# Altium PCB 6F_Test.PcbDoc
Units mm, origin at the board's own origin, x right, y up, seen from the top; angles counter-clockwise.
Board outline 156 x 86.1 mm, 2 copper layers (Top Layer, Bottom Layer); 56 components, 44 nets, 190 pads, 1 vias.
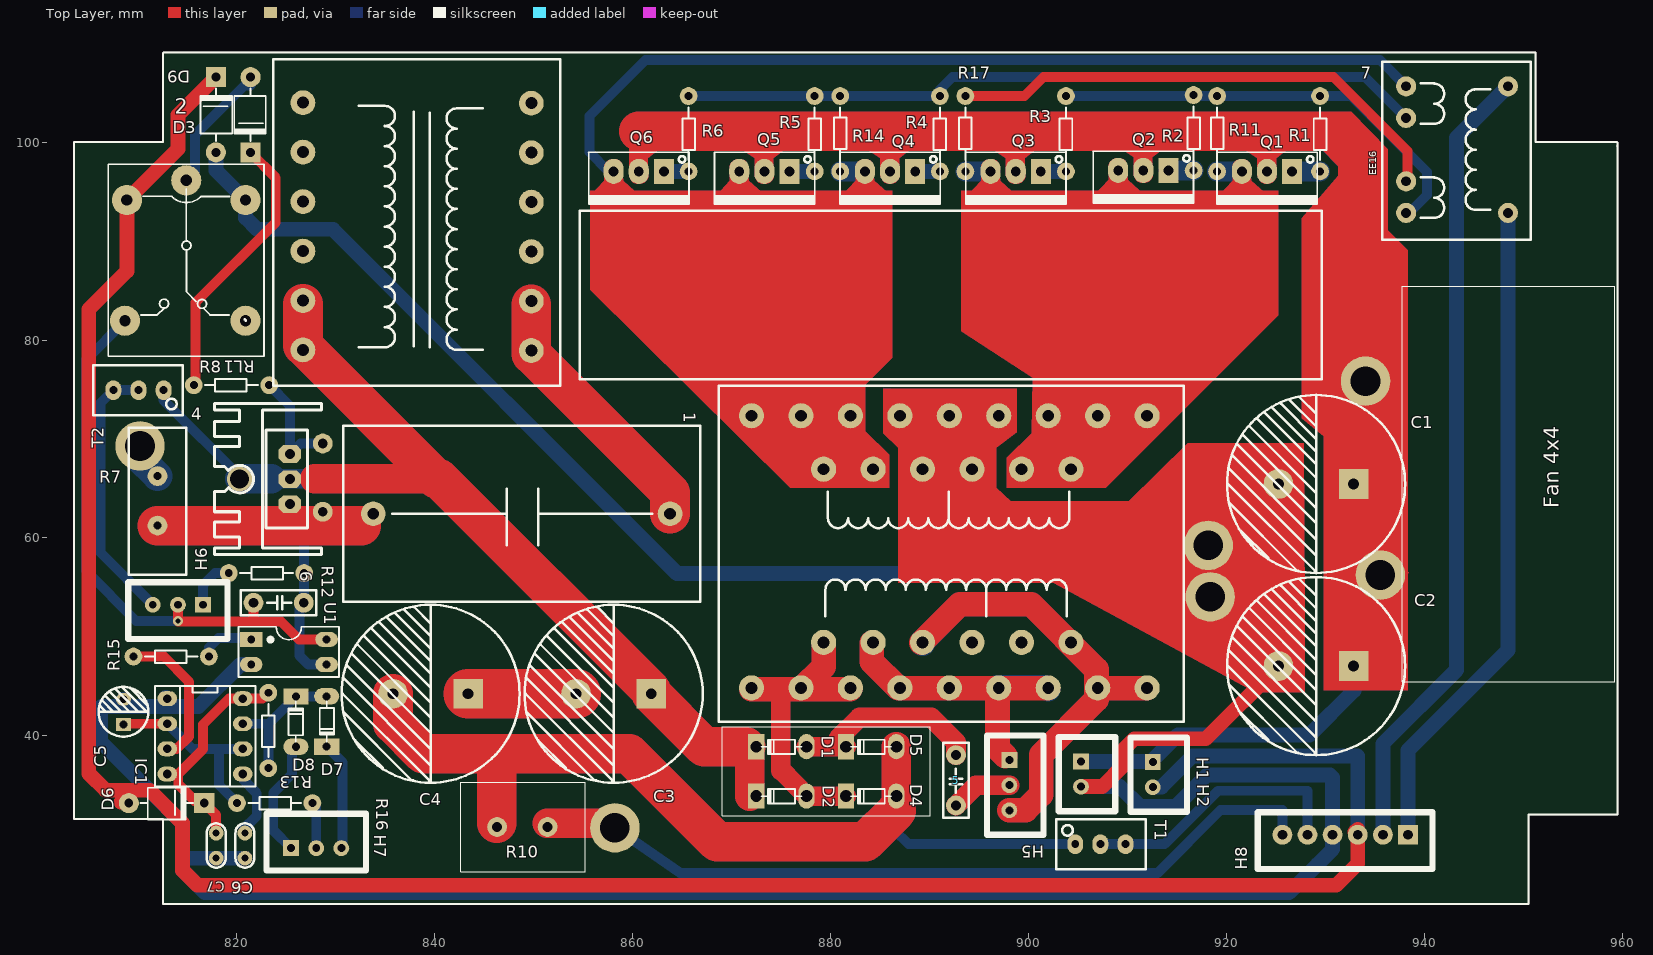
[diagram p0: Top Layer view]
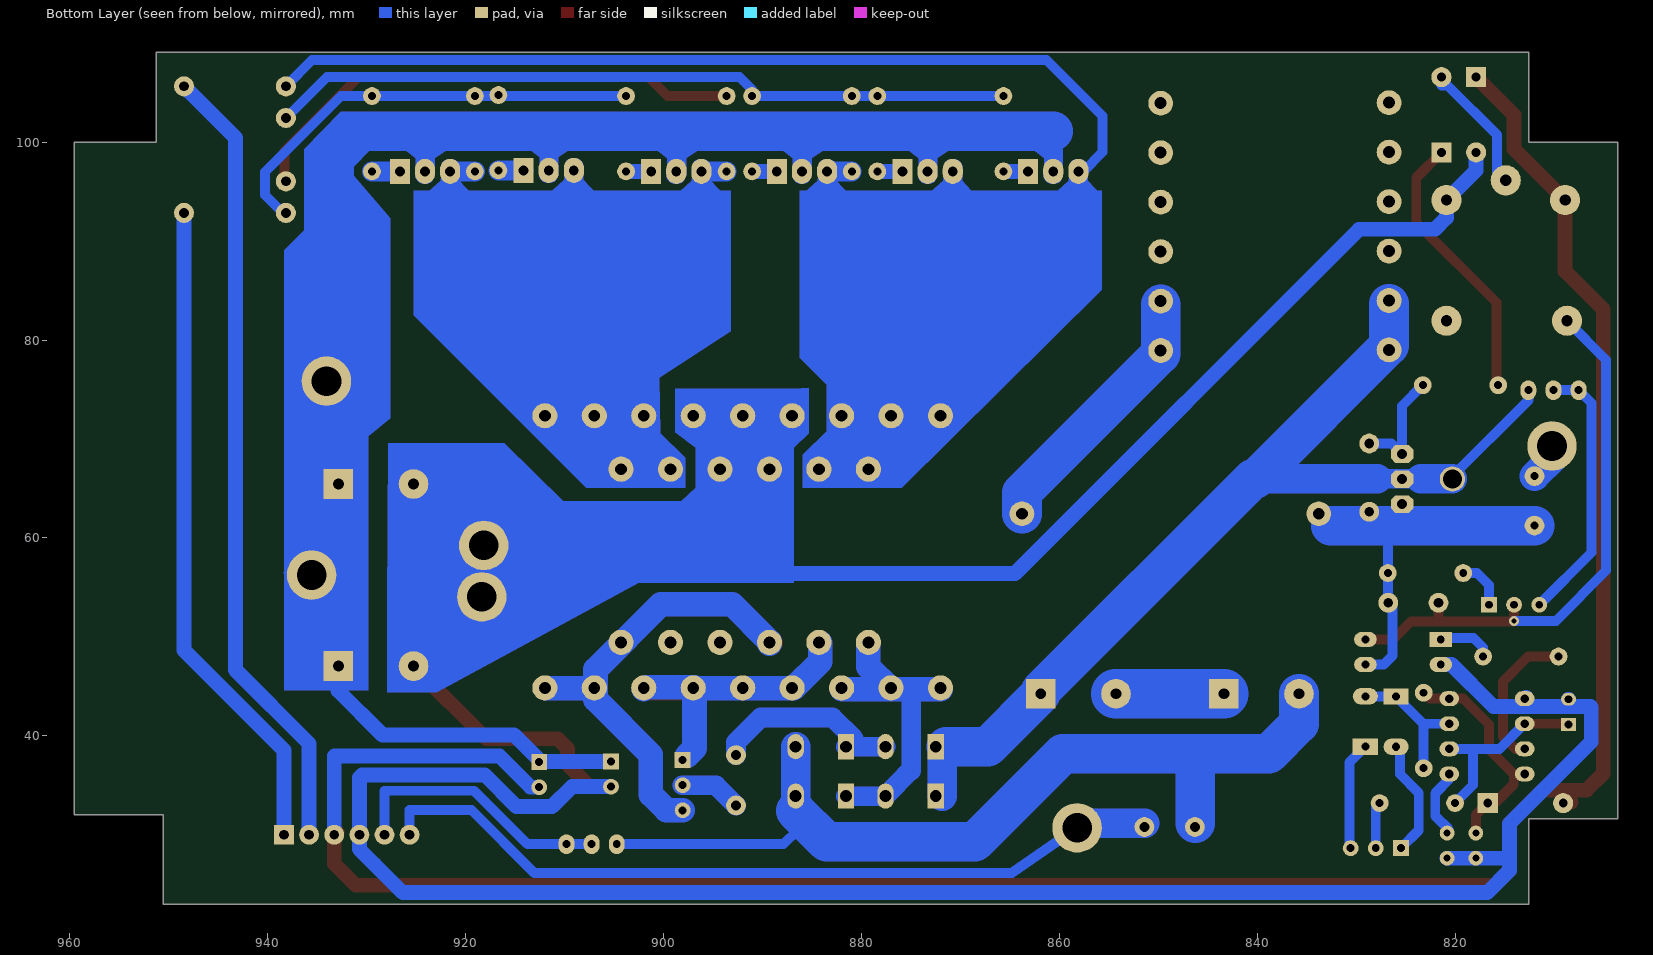
[diagram p1: Bottom Layer view, seen from below]
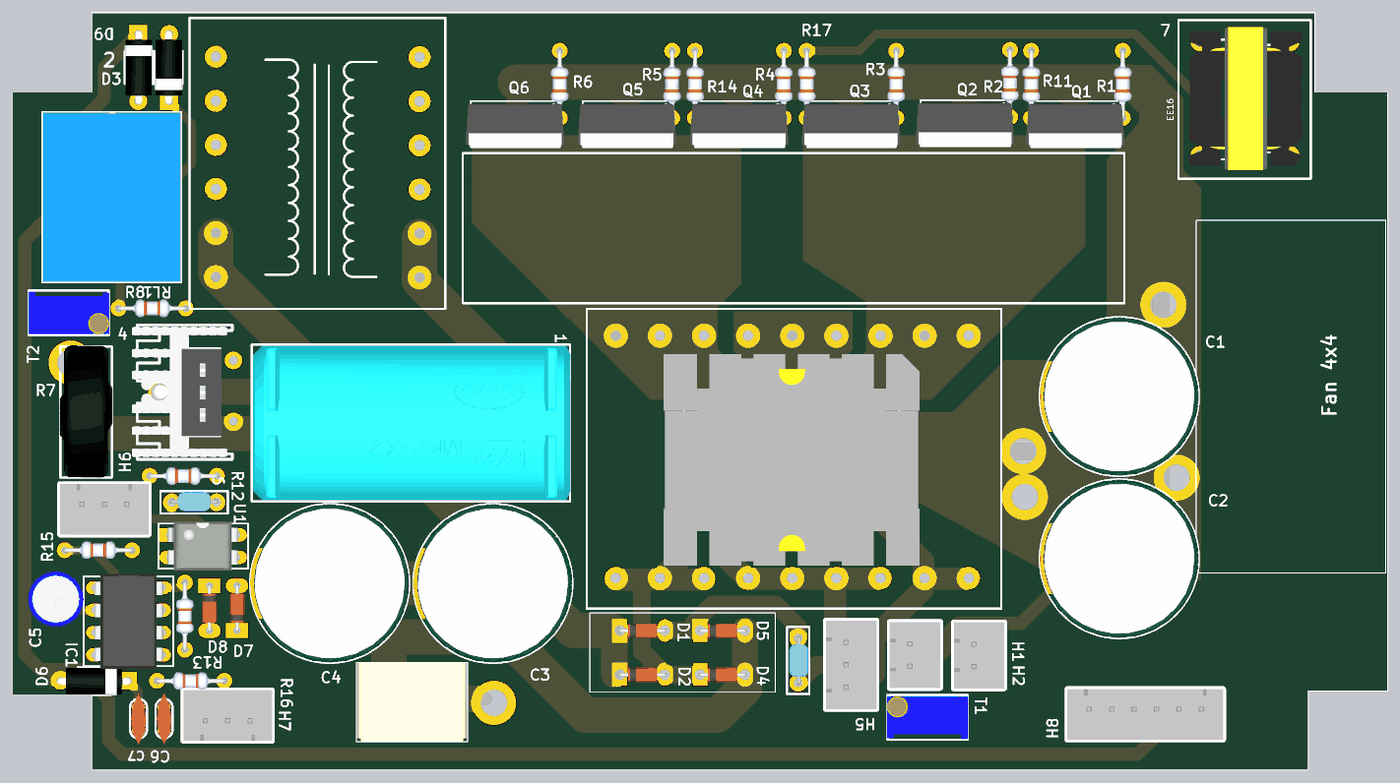
[diagram p2: 3D render of the assembled board from above, using the file's embedded part models]

## Layer stack, top to bottom
Top Layer: signal copper 0.0356
Dielectric: dielectric 0.32, FR-4, Dk 4.8
Bottom Layer: signal copper 0.0356

## Board outline
812.571,109.1 812.571,100 803.571,100 803.571,31.6 812.571,31.6 812.571,23 950.571,23 950.571,32 959.571,32 959.571,100 951.271,100 951.271,109.1 812.571,109.1

## Design rules (kind name [scope] priority, off if disabled: settings)
Clearance [All] p1: gap=0.254
PolygonConnect [All] p1: connectstyle=Relief reliefconductorwidth=0.254 reliefentries=4 polygonreliefangle="90 Angle"
RoomDefinition 6F [InComponentClass('6F')] p1: confinementstyle=ConfineIn formatcopy=TRUE lockcomponents=FALSE outline 840.266,26.56 887.166,26.56 887.166,63.26 840.266,63.26
RoutingVias [All] p1: holewidth=0.711 width=1.27 viastyle="Through Hole" minholewidth=0.711 minwidth=1.27 maxholewidth=0.711 maxwidth=1.27
SilkscreenOverComponentPads [All] p1: minsilkscreentomaskgap=0.254
SolderMaskExpansion [All] p1: expansion=0.102
Width [All] p1: maxlimit=10 minlimit=0.254 preferedwidth=0.254
27 further rules are at their usual default settings.

## Components (designator, comment, footprint, x,y, rotation, side; value= is the part's Value field where it differs from the comment)
1 "Cap_5UF250V" Cap_5UF250V 863.771,62.45 r0 top
2 "INDUCTOR_EE33" EE33 826.671,79 r90 top
4 "TYN_1225" QTO-220H3 825.351,63.41 r90 top
5 "Cap_684J250V" Cap_104J400V 892.671,38.05 r270 top
6 "Cap_104J400V" Cap_104J400V 821.671,53.45 r0 top
7 "EE16" EE16 938.171,92.85 r90 top
C1 "4700uF" "tu hoa 18mm" 929.071,65.45 r0 top
C2 "4700uF" "tu hoa 18mm" 929.071,47.05 r0 top
C3 "100uF" "tu Hoa 18mm" 858.071,44.25 r0 top
C4 "100uF" "tu Hoa 18mm" 839.571,44.25 r0 top
C5 "1uF" "tu hoa 5mm" 808.525,42.425 r90 top
C6 "104" "tu gom" 820.8,28.9 r270 top
C7 "104" "tu gom" 817.9,28.9 r270 top
D1 "Diode" "DIODE 0.5A"#1 875.025,38.901 r0 top
D2 "Diode" "DIODE 0.5A"#1 875.025,33.901 r0 top
D3 "100v" "DIODE 1A" 821.371,107.85 r90 top
D4 "Diode" "DIODE 0.5A"#1 884.105,33.901 r0 top
D5 "Diode" "DIODE 0.5A"#1 884.105,38.901 r0 top
D6 "100v" "DIODE 1A" 807.8,33.2 r180 top
D7 "100v" "DIODE 0.5A"#2 829.071,41.45 r90 top
D8 "100v" "DIODE 0.5A"#2 825.95,41.437 r270 top
D9 "100v" "DIODE 1A" 817.871,97.7 r270 top
H1 "Fan" XH2.54M-2 905.311,37.401 r270 top
H2 "JackCoBop" XH2.54M-2 912.571,37.35 r270 top
H5 "Switch" XH2.54M-3 898.071,37.55 r270 top
H6 "TanSo" XH2.54M-3 816.571,53.25 r180 top
H7 "TanSo" XH2.54M-3 825.471,28.65 r0 top
H8 "Header 6P 2.54 Duc Thang" XH2.54M-6 938.365,30.001 r180 top
IC1 "LM555 DIP" DIP8 816.771,39.95 r270 top
Q1 "IRF840" QTO-220 926.651,97.05 r180 top
Q2 "IRF840" QTO-220 914.151,97.15 r180 top
Q3 "IRF840" QTO-220 901.251,97.05 r180 top
Q4 "IRF840" QTO-220 888.551,97.05 r180 top
Q5 "IRF840" QTO-220 875.851,97.05 r180 top
Q6 "IRF840" QTO-220 863.151,97.05 r180 top
R1 "100" PCBComponent_1 929.471,104.67 r270 top
R2 "100" PCBComponent_1 916.691,104.77 r270 top
R3 "100" PCBComponent_1 903.791,104.67 r270 top
R4 "100" PCBComponent_1 891.051,104.67 r270 top
R5 "100" PCBComponent_1 878.391,104.67 r270 top
R6 "100" PCBComponent_1 865.651,104.67 r270 top
R7 "5D-9" "tro nhiet d-9" 811.971,63.75 r90 top
R8 "100" PCBComponent_1 823.257,75.445 r180 top
R10 "0.47R" Res_5W 838.497,27.185 r0 top
R11 "2k2" PCBComponent_1 919.071,97.05 r90 top
R12 "2k2" PCBComponent_1 819.171,56.45 r0 top
R13 "18K/4148" PCBComponent_1 823.171,44.35 r270 top
R14 "2k2" PCBComponent_1 880.971,97.05 r90 top
R15 "2k2" PCBComponent_1 817.161,48.013 r180 top
R16 "18K/4148" PCBComponent_1 820,33.2 r0 top
R17 "0" PCBComponent_1 893.623,97.05 r90 top
RL1 "Relay" "Relay 5 Chan SRD" 814.871,96.15 r270 top
T1 "10K" "Bien Tro Vi Chinh Dung" 907.271,29.05 r0 top
T2 "10K" "Bien Tro Vi Chinh Dung" 810.049,74.937 r180 top
U1 "OPTO PC817 DIP4" DIP4 821.371,49.75 r270 top
? "E2842" E2842 867.8,38.6 r0 top

## Footprints (in the part's own frame and the unit in brackets; to place one, negate y for a bottom-side part, rotate by r counter-clockwise, add the part's x,y. Pads: shape width x height; smd on the part's side, far side on the other; paste and mask are expansions set on the pad)
"Bien Tro Vi Chinh Dung" [mm] "Bien tro vi chinh"
  oval 1.6x2 hole 0.8: 1(-2.54,0) 2(0,0) 3(2.54,0)
  silkscreen extent -4.47,-2.54 4.6,2.54, body extent -4.54,-2.4 4.66,2.4, height 12.02
Cap_5UF250V [mm] "C?"
  round 2.5 hole 1.2: 1(0,0) 2(-30,0)
  silkscreen extent -33.02,-8.89 3.05,8.89, body extent -32.89,-8.75 3.11,8.75, height 31.5
Cap_104J400V [mm] "C?"
  round 2 hole 1: 1(0,0) 2(5.08,0)
  silkscreen extent -1.27,-1.27 6.35,1.27, body extent -0.25,-1.02 5.33,1.19, height 6
"DIODE 0.5A"#1 [mm] "Diode muoi, xung"
  oval 1.651x2.54 hole 1.2: 1(2.54,0)
  rect 1.651x2.54 hole 1.2: 2(-2.54,0)
  silkscreen extent -2.03,-0.76 2.03,0.71, body extent -2.76,-0.84 2.76,0.81, height 1.56
"DIODE 0.5A"#2 [mm] "Diode muoi, xung"
  oval 1.651x2.54 hole 0.813: 1(2.54,0)
  rect 1.651x2.54 hole 0.813: 2(-2.54,0)
  silkscreen extent -2.03,-0.76 2.03,0.71, body extent -2.76,-0.84 2.76,0.81, height 1.56
"DIODE 1A" [mil] "Diode 1A"
  round 80 hole 35: 1(-50,0)
  rect 80x80 hole 35: 2(-350,0)
  silkscreen extent -305,-61 -95,65, body extent -366,-61 -34,65, height 122
DIP4 [mil] "W.300/L.400"
  rect 60x90 hole 31: 1(0,2.52)
  oval 60x90 hole 31: 2(100,2.52) 3(100,302.52) 4(0,302.52)
  silkscreen extent -50,-47 150,353, body extent -59,-7 159,307, height 170
DIP8 [mm] "W.300/L.400"
  oval 1.5x2 hole 0.864: 1(-3.81,-3.81) 2(-1.27,-3.81) 3(1.27,-3.81) 4(3.81,-3.81) 5(3.81,3.81) 6(1.27,3.81) 7(-1.27,3.81) 8(-3.81,3.81)
  silkscreen extent -5.08,-5.08 5.08,5.08, body extent -5.4,-3.88 5.4,3.88, height 4.5
E2842 [mm] "L?"
  round 2.54 hole 1.2: 0v(4.2,6.25) 0v(9.2,6.25) 0v(11.5,10.85) 0v(14.2,6.25) D1(4.2,33.75) D1(9.2,33.75) D1(11.5,28.35) D1(14.2,33.75) D1(16.5,28.35) D2(31.5,28.35) D2(34.2,33.75) D2(36.5,28.35) D2(39.2,33.75) D2(44.2,33.75) GND(19.2,33.75) GND(21.5,28.35) GND(24.2,33.75) GND(26.5,28.35) GND(29.2,33.75) Out1(16.5,10.85) Out1(19.2,6.25) Out1(24.2,6.25) Out1(29.2,6.25) Out1(34.2,6.25) Out2(21.5,10.85) Out2(36.5,10.85) Out2(39.2,6.25) Out2(44.2,6.25) ""(26.5,10.85) ""(31.5,10.85)
  Bottom Layer lines w2: 21.5,10.85 21.582,10.85
  silkscreen extent 0.9,2.8 47.9,36.8, body extent 9.62,7.66 38.62,31.66, height 21.4
EE16 [mil] "L?"
  round 80 hole 39: 1(0,-405.51) 2(503.94,-405.51) G1(0,0) G2(377.95,0) S1(125.98,0) S2(503.94,0)
  silkscreen extent -106,-496 602,94, body extent -67,-461 571,48, height 652
EE33 [mm] "?"
  round 2.5 hole 1.2: 1(0,0) 1(5,0) 3(10,0) 4(15,0) 5(20,0) 6(25,0) 7(-0.054,-23.085) 7(4.946,-23.085) 9(9.946,-23.085) 10(14.946,-23.085) 11(19.946,-23.085) 12(24.946,-23.085)
  silkscreen extent -3.6,-26 29.4,3
PCBComponent_1 [mm]
  round 1.8 hole 0.8: 0(0,0) 1(7.62,0)
  silkscreen extent 1.14,-0.63 6.48,0.64, body extent -0.24,-1.02 7.86,0.98, height 2
QTO-220 [mil] "TO-220 - 1-2-3"
  rect 80x100 hole 39: 1(0,0)
  oval 80x100 hole 39: 2(100,0) 3(200,0)
  silkscreen extent -100,-76 300,130, body extent -119,-64 322,121, height 755
QTO-220H3 [mil] "TO-220 1-2-3"
  oct 70x90 hole 40: 1(0,0) 2(100,0) 3(200,0)
  round 100 hole 75: 2(100,200)
  silkscreen extent -200,-125 400,300, body extent -190,-102 392,323, height 984
"Relay 5 Chan SRD" [mil] "Relay SPDT, 5 pin, 10A,W 650mil, L 800mil, H 800mil"
  round 120 hole 45: 1(0,0) 2(559.06,236.22) 3(559.06,-243.78) 4(78.74,-236.22) 5(78.74,236.22)
  silkscreen extent -63,-311 700,310, body extent -55,-306 697,304, height 602
Res_5W [mm] "R?"
  round 2 hole 1: 1(7.8,3.6) 2(12.9,3.6)
  silkscreen extent 4.1,-0.9 16.7,8.1, body extent 4.15,-0.9 16.65,8.1, height 25
"tro nhiet d-9" [mm]
  round 2 hole 0.8: 1(-2.5,0) 2(2.5,0)
  silkscreen extent -7.49,-2.92 7.37,2.92, body extent -7.5,-3 7.5,3, height 23.5
"tu gom" [mm] "Tu gom mini"
  round 1.5 hole 0.7: 1(-1.27,0) 2(1.27,0)
  silkscreen extent -2.25,-0.97 2.22,0.97, body extent -2.92,-0.85 2.92,0.85, height 6.12
"tu hoa 5mm" [mm]
  rect 1.3x1.5 hole 0.8: 1(-1.27,0)
  oval 1.3x1.5 hole 0.8: 2(1.27,0)
  silkscreen extent -2.51,-2.51 2.51,2.51, body extent -3.12,-3.18 3.23,3.18, height 14.55
"tu hoa 18mm" [mm]
  rect 3x3 hole 1.1: 1(3.8,0)
  round 3 hole 1.1: 2(-3.8,0)
  silkscreen extent -9,-9 9,9, body extent -9.01,-9 9,9, height 3
"tu Hoa 18mm" [mm]
  rect 3x3 hole 1.1: 1(3.8,0)
  round 3 hole 1.1: 2(-3.8,0)
  silkscreen extent -9,-9 9,9, body extent -9.01,-9 9,9, height 3
XH2.54M-2 [mm]
  rect 1.6x1.6 hole 0.8: 1(0,0)
  round 1.6 hole 0.8: 2(2.54,0)
  silkscreen extent -2.48,-2.26 5.02,3.46, body extent -2.48,-2.26 5.02,3.48, height 6.91
XH2.54M-3 [mm]
  rect 1.6x1.6 hole 0.8: 1(0,0)
  round 1.6 hole 0.8: 2(2.54,0) 3(5.08,0)
  silkscreen extent -2.48,-2.26 7.56,3.46, body extent -2.48,-2.26 7.56,3.48, height 6.91
XH2.54M-6 [mm]
  rect 2x2 hole 1: 1(0,0)
  round 2 hole 1: 2(2.54,0) 3(5.08,0) 4(7.62,0) 5(10.16,0) 6(12.7,0)
  silkscreen extent -2.48,-2.26 15.18,3.46, body extent -2.48,-2.26 15.18,3.48, height 6.91

## Part data
1 5 6: "C?"
2 7 ?: "L?"
C1 C2: library part "Tu Hoa 4700uF 35V 18x30", "C?m"
C3 C4: library part "Tu Hoa 100uF 450V 18x35", "C?m"
C5: library part "Tu Hoa 1uF 50V 5x11", "C?m"
C6 C7: library part "Tu gom 104 50V", "C?m"
D1 D2 D4 D5: "Default Diode"
D3 D6 D9: library part "Diode 1N4007", "C?m"
D7 D8: library part "Diode 1N4148", "C?m"
H1 H2: library part "Header 2P 2.54 Duc Thang", "C?m"
H5 H6 H7: library part "Header 3P 2.54 Duc Thang", "C?m"
H8: "C?m"
IC1: "Dán"
Q1 Q2 Q3 Q4 Q5 Q6: "MOSFET N - CHANNEL 500V - 0.75 - 8A - TO-220"
R1 R2 R3 R4 R5 R6 R8 R11 R12 R13 R14 R15 R16 R17: library part Res_7.62, "R?"
R7: library part "Tro Nhiet NTC 5D-9", "C?m"
R10: library part Res_5W
RL1: library part "Relay 5 Chan SRD", "Relay 5 Chan"
T1 T2: library part "Bien Tro Tinh Chinh 10K Dung", "C?m"
U1: "Single Opto"

## Free pads (board coordinates)
  round 2 hole 1: 2(828.671,69.55) 3(828.671,62.65)
  round 5 hole 3: 3(810.2,69.3) 3(858.2,30.7) 3(918.171,59.25) 3(918.371,54.05) 3(934.071,75.85) 3(935.571,56.25)

## Via types
v1: diameter 1, hole 0.5, Top Layer to Bottom Layer, 1 vias

## Nets (pads, with @x,y where several pads share a name; then routed paths per layer and width w, separated by ;. In a path a pad name is that pad's centre, name@x,y a point inside that pad or via, vN(x,y) a via of type N, cw(c..) or ccw(c..) an arc to the next point about the centre after c; other vN are vias at no path point)
12V: C1.1 C2.1 H1.1 H2.1 pad.3@934.071,75.85 pad.3@935.571,56.25 Q1.2 Q2.2 Q3.2 Q4.2 Q5.2 Q6.2 | length 176.9
  Top Layer w4: 860.611,101.099 911.297,101.099 930.572,101.099
  Bottom Layer w1.5: H1.1 H2.1@912.571,37.401 ; H2.1 H2.1@912.571,37.401 ; C2.1 932.925,46.996 932.925,44.593 928.41,40.078 915.099,40.078 912.571,37.55 H2.1@912.571,37.401
  Bottom Layer w4: 860.611,101.099 911.297,101.099 930.572,101.099 933.239,98.432
-300V: C4.2 D4.1 D5.1 R10.1 T1.1 | length 166.6
  Top Layer w3: 886.645,32.413 D5.1
  Top Layer w4: C4.2 835.771,41.23 838.817,38.185 846.025,38.185 ; R10.1@846.271,31.15 846.271,37.939 846.025,38.185 ; 886.645,32.413 883.525,29.293 868.525,29.293 859.633,38.185 846.025,38.185
  Bottom Layer w1: 886.477,30.445 887.871,29.05 T1.1
  Bottom Layer w2: 846.025,36.55 846.271,36.55
  Bottom Layer w3: 886.645,32.413 D5.1
  Bottom Layer w4: C4.2 835.771,41.23 838.817,38.185 846.025,38.185 ; R10.1@846.271,31.15 846.271,36.55 846.271,37.939 846.025,38.185 ; 886.645,32.413 883.525,29.293 868.525,29.293 859.633,38.185 846.025,38.185
COBOP2: D6.1 D9.2 H2.2 H8.3 RL1.4 | length 247.3
  Top Layer w1.5: D6.1@808.271,33.281 809.483,34.493 ; D9.2@817.871,106.58 814.025,102.734 814.025,99.304 RL1.4 808.871,86.95 805.025,83.104 805.025,36.196 806.728,34.493 809.483,34.493 ; H8.3@933.009,30.277 H8.3@933.285,30.553 ; H8.3 933.285,27.085 931.093,24.893 816.007,24.893 814.5,26.4 814.5,31.176 811.183,34.493 809.483,34.493
  Bottom Layer w1.5: H2.2 913.431,34.81 916.571,37.95 933.271,37.95 ; H8.3 933.285,37.936
DB3: D3.1 RL1.1 | length 12.6
  Bottom Layer w1: RL1.1 815.771,97.05 815.771,100.75 820.761,105.74 D3.1@821.371,105.74
E16_1: 7.1 H8.1 | length 67
  Bottom Layer w1.5: H8.1 938.365,38.544 948.471,48.65 7.1
E16_2: 7.2 H8.2 | length 80.9
  Bottom Layer w1.5: H8.2 935.825,39.204 943.271,46.65 943.271,100.45 7.2
G1: 7.G1 R1.0 R2.0 R3.0 R11.1 | length 44.8
  Bottom Layer w1: R3.0 R11.1 932.589,104.67 940.271,96.988 940.271,94.65 938.471,92.85 7.G1
G2: 7.G2 R4.0 R5.0 R6.0 R14.1 | length 75.4
  Bottom Layer w1: R6.0 R5.0 R14.1 R4.0 891.051,105.33 892.314,106.593 934.028,106.593 7.G2
GND: ?.GND C1.2 C2.2 C5.2 C6.2 C7.2 D9.1 H1.2 H8.4 IC1.1 pad.3@918.171,59.25 pad.3@918.371,54.05 RL1.5 U1.2 | length 315.7
  Top Layer w1.5: H1.2 907.461,34.861 909.7,37.1 909.7,38.7 910.7,39.7 917.921,39.7 C2.2
  Bottom Layer w1.5: C5.2@808.525,43.497 C5.2 ; IC1.1@812.828,43.893 IC1.1 ; D9.1@817.871,98.96 817.871,97.15 RL1.5 820.871,92.347 822.018,91.2 829.691,91.2 864.48,56.411 890.243,56.411 ; C6.2 C7.2 814.678,27.63 814.508,27.8 ; U1.2 820.357,47.21 816.125,42.978 806.31,42.978 806.225,42.893 806.225,39.393 814.508,31.11 814.508,27.8 ; H1.2 909.26,34.861 911.271,32.85 914.871,32.85 918.071,36.05 930.471,36.05 930.745,35.776 H8.4 930.745,28.545 929.184,26.984 926.35,24.15 816.75,24.15 814.508,26.392 814.508,27.8
Net1_1: 1.1 2.7 | length 53.9
  Top Layer w4: 2.7@849.756,83.596 849.756,78.596 863.771,64.581 1.1
  Bottom Layer w4: 2.7@849.756,83.596 849.756,78.596 863.771,64.581 1.1
Net4_3: 4.3 pad.2 R8.0 | length 11.6
  Bottom Layer w1: R8.0 825.351,73.351 4.3 826.411,69.55 pad.2
Net5_1: 5.1 D1.1 D5.2 | length 38.3
  Top Layer w2: D1.1 D5.2 ; D5.2@880.768,39.698 882.92,41.85 890.171,41.85 892.671,39.35 5.1
  Bottom Layer w2: D1.1 D5.2 ; D5.2@880.768,39.698 882.92,41.85 890.171,41.85 892.671,39.35 5.1
Net5_2: 5.2 H5.2 | length 12.3
  Top Layer w2: 5.2 894.642,34.941 ; 894.711,35.01 H5.2
  Bottom Layer w2: 5.2 894.642,34.941 ; 894.711,35.01 H5.2
Net7_S1: 7.S1 R17.1 | length 51.7
  Top Layer w1: R17.1 899.599,104.67 901.522,106.593 930.825,106.593 938.325,99.093 938.325,96.204 7.S1
Net_0v: ?.0v D2.1 D4.2 | length 62.7
  Top Layer w2: 874.971,36.495 874.971,44.7 ; 875.071,36.495 D2.1 D4.2
  Top Layer w2.5: ?.0v@872,44.7 874.971,44.7 ?.0v@877,44.7 ; ?.0v@879.3,49.3 879.3,47 ?.0v@877,44.7 ; ?.0v@882,44.7 ?.0v@877,44.7
  Bottom Layer w2: 874.971,36.495 874.971,44.7 ; 875.071,36.495 D2.1 D4.2
  Bottom Layer w2.5: ?.0v@872,44.7 874.971,44.7 ?.0v@877,44.7 ; ?.0v@879.3,49.3 879.3,47 ?.0v@877,44.7 ; ?.0v@882,44.7 ?.0v@877,44.7
Net_Out1: ?.Out1 H5.1 | length 56
  Top Layer w2.5: ?.Out1@884.171,49.4 884.171,47.5 886.871,44.8 ?.Out1@896.871,44.8 ; H5.1@897.661,37.961 896.871,38.75 ?.Out1@896.871,44.8 ; ?.Out1@901.871,44.8 ?.Out1@896.871,44.8
  Bottom Layer w2.5: ?.Out1@884.171,49.4 884.171,47.5 886.871,44.8 ?.Out1@896.871,44.8 ; H5.1@897.611,38.011 896.871,38.75 896.871,44.9 901.8,44.9 ?.Out1@902,44.7
Net_Out2: ?.Out2 H5.3 | length 91.8
  Top Layer w2.5: ?.Out2@889.171,49.4 893.064,53.293 900.278,53.293 906.871,46.7 ?.Out2@906.871,44.8 ; H5.3 899.691,32.47 901.3,34.079 901.3,38.1 906.871,43.671 ?.Out2@906.871,44.8 ; ?.Out2@911.871,44.8 ?.Out2@906.871,44.8
  Bottom Layer w2.5: ?.Out2@889.3,49.3 889.3,49.529 893.064,53.293 900.278,53.293 906.871,46.7 ?.Out2@906.871,44.8 ; H5.3 899.691,32.47 901.3,34.079 901.3,38.1 906.871,43.671 ?.Out2@906.871,44.8 ; ?.Out2@911.871,44.8 ?.Out2@906.871,44.8
NetC3_2: C3.2 C4.1 | length 21.8
  Top Layer w5: C4.1 C3.2
  Bottom Layer w5: C4.1 C3.2
NetC5_1: C5.1 IC1.2 IC1.6 R16.0 | length 21.1
  Top Layer w1: C5.1 808.59,41.22 IC1.2
  Bottom Layer w1: IC1.2 815.501,38.68 818.225,38.68 ; 818.901,38.68 IC1.6 818.225,38.68 ; R16.0 818.171,35.029 818.171,38.626 818.225,38.68
NetC6_1: C6.1 IC1.5 | length 6.7
  Bottom Layer w1: IC1.5 820.581,35.619 822,34.2 822,31.909 C6.1@820.641,30.55
NetC7_1: C7.1 D6.2 IC1.4 IC1.8 R13.0 | length 22.2
  Top Layer w1: IC1.4 814.061,36.14 ; D6.2@815.891,33.281 814.061,35.111 814.061,36.14 ; D6.2 817.9,31.99 C7.1 ; R13.0 822.581,43.76 IC1.8 819.181,43.76 816.571,41.15 816.571,38.65 814.061,36.14
NetD3_2: D3.2 R8.1 | length 28
  Top Layer w1: R8.1 815.825,75.633 815.825,83.793 823.925,91.893 823.925,96.406 D3.2
NetD7_1: D7.1 D8.2 IC1.7 R13.1 | length 14.1
  Bottom Layer w1: IC1.7 823.149,41.22 823.171,41.198 ; R13.1 823.171,41.198 ; D7.1 825.963,43.99 D8.2 823.171,41.198
NetD7_2: D7.2 H7.3 | length 10.8
  Bottom Layer w1: D7.2 830.651,37.33 H7.3@830.651,28.75
NetD8_1: D8.1 H7.1 | length 11.4
  Bottom Layer w1: H7.1 823.671,30.45 823.671,34.225 825.571,36.125 D8.1@825.571,38.518
NetH6_1: H6.1 R12.0 | length 5.1
  Bottom Layer w1: H6.1 816.571,55.25 817.771,56.45 R12.0
NetH6_3: H6.3 T2.2 T2.3 | length 27
  Bottom Layer w1: T2.2 T2.3 806.2,73.628 806.2,58.541 H6.3
NetH7_2: H7.2 R16.1 | length 4.7
  Bottom Layer w1: R16.1 828.011,32.809 H7.2
NetIC1_3: IC1.3 R15.1 | length 14.9
  Top Layer w1: R15.1 812.608,48.013 815.171,45.45 815.171,39.95 813.901,38.68 IC1.3
NetQ1_1: Q1.1 R1.1 | length 2.8
  Bottom Layer w2: Q1.1 R1.1
NetQ2_1: Q2.1 R2.1 | length 2.5
  Bottom Layer w2: Q2.1 R2.1
NetQ3_1: Q3.1 R3.1 | length 2.5
  Bottom Layer w1.5: Q3.1 R3.1
NetQ4_1: Q4.1 R4.1 | length 2.5
  Bottom Layer w1.5: Q4.1 R4.1
NetQ5_1: Q5.1 R5.1 | length 2.5
  Bottom Layer w1.5: Q5.1 R5.1
NetQ6_1: Q6.1 R6.1 | length 2.5
  Bottom Layer w1.5: Q6.1 R6.1
NetR15_0: R15.0 U1.1 | length 6
  Bottom Layer w1: R15.0 817.161,48.929 818.125,49.893 821.292,49.893 U1.1 U1.1@821.071,49.75
OUT+: pad.3@810.2,69.3 R7.2 | length 3.9
  Bottom Layer w3: pad.3@810.2,69.3 809.971,68.25 R7.2
PC817_1: H8.6 pad.3@858.2,30.7 R10.2 | length 86.7
  Top Layer w3: R10.2@851.371,31.15 pad.3@857.171,31.15
  Bottom Layer w1: pad.3@858.2,30.7 864.771,26.15 913.071,26.15 919.422,32.501 925.665,32.501 H8.6
  Bottom Layer w3: R10.2@851.371,31.15 857.171,31.15 pad.3@858.2,30.7
PC817_2: H8.5 T1.2 T1.3 | length 27.4
  Bottom Layer w1: T1.2 T1.3 913.771,29.05 919.171,34.45 928.205,34.45 928.205,30.7 H8.5@927.856,30.35
RL2: 6.1 H6.2 RL1.3 U1.4 | length 57.6
  Top Layer w1: v1@814.031,51.55 v1@814.091,51.55 ; H6.2 v1(814.031,51.61) v1@814.091,51.55 ; 821.671,51.604 6.1 ; U1.4 826.268,49.75 824.468,51.55 v1@814.091,51.55
  Bottom Layer w1: RL1.3 804.725,77.996 804.725,56.693 809.808,51.61 v1(814.031,51.61)
S1: ?.D2 Q1.3 Q2.3 Q3.3 R11.0 R17.0 | length 8.1
  Bottom Layer w1.5: 909.071,94.05 Q2.3
  Bottom Layer w2: R17.0 Q3.3 ; R11.0 Q1.3
S2: 7.S2 ?.D1 Q4.3 Q5.3 Q6.3 R14.0 | length 95.9
  Bottom Layer w1: Q6.3 857.568,97.05 855.625,98.993 855.625,102.643 861.275,108.293 935.528,108.293 7.S2 7.S2@937.671,105.65
  Bottom Layer w2: R14.0 Q4.3
SCR_A: 2.1 4.2 C3.1 D1.2 D2.2 T2.1 | length 190.5
  Top Layer w3: 827.871,65.99 840.131,65.99 ; 840.431,65.99 840.931,65.99 ; D2.2@871.825,33.893 D1.2@871.825,38.893
  Top Layer w4: 2.1@826.671,83.65 826.671,79.45 840.131,65.99 ; 840.431,65.99 861.871,44.55 C3.1 867.22,38.901 871.425,38.901
  Bottom Layer w1: T2.1 812.589,73.921 820.56,65.95 4.2@825.351,65.95
  Bottom Layer w2: 823.925,65.99 827.871,65.99
  Bottom Layer w3: 4.2@820.291,65.99 823.466,65.99 ; 827.871,65.99 840.131,65.99 ; D2.2@871.825,33.893 D1.2@871.825,38.893
  Bottom Layer w4: 2.1@826.671,83.65 826.671,79.45 840.131,65.99 ; 840.431,65.99 861.871,44.55 C3.1 867.22,38.901 871.425,38.901
SCR_K: 1.2 4.1 6.2 pad.3@828.671,62.65 R7.1 R12.1 U1.3 | length 61.9
  Top Layer w4: R7.1 832.571,61.25
  Bottom Layer w1: 6.2 826.325,53.024 826.325,48.093 827.208,47.21 U1.3 ; 826.791,59.47 R12.1 826.791,53.41 6.2@826.851,53.35 ; 825.351,61.276 4.1 825.351,61.276
  Bottom Layer w2: 832.571,61.25 1.2
  Bottom Layer w4: R7.1 825.325,61.25 ; 825.351,61.25 832.571,61.25
pads on no net: 2.3 2.4 2.5 2.6 2.9 2.10 2.11 2.12 ?. RL1.2

## Other copper
Top Layer:
  region net GND: 927.825,69.593 916.125,69.593 910.125,63.693 898.225,63.693 896.725,65.093 896.725,69.093 898.825,70.693 898.825,75.093 886.825,75.093 885.321,75.1 885.325,70.593 886.825,69.093 886.825,55.493 902.525,55.493 922.925,44.393 927.925,44.393 927.925,52.893
  region net S1: 900.325,70.593 900.425,76.193 893.225,80.893 893.225,95.093 925.225,95.093 925.225,82.493 913.325,70.593 907.825,65.093 897.825,65.093 897.825,68.093
  region net 12V: 931.325,97.593 931.325,96.593 927.625,92.293 927.625,72.093 929.825,70.293 929.825,44.593 938.325,44.593 938.325,56.393 938.425,56.493 938.325,56.593 938.325,89.093 936.325,91.093 936.325,99.293 932.625,103.093 929.525,103.093 929.525,99.393
  region net 12V: 931.325,97.593 931.325,96.593 927.625,92.293 927.625,72.093 929.825,70.293 929.825,44.593 938.325,44.593 938.325,56.393 938.425,56.493 938.325,56.593 938.325,89.093 936.325,91.093 936.325,99.293 932.625,103.093 929.525,103.093 929.525,99.393
  region net 12V: 925.057,96.407 925.025,98.393 926.457,99.507 921.457,99.507 923.125,98.393 923.125,96.593 923.357,96.107 923.557,95.907 923.857,95.807 924.357,95.807 924.657,95.907 924.957,96.207
  region net 12V: 912.557,96.507 912.525,98.493 913.957,99.607 908.957,99.607 910.625,98.493 910.625,96.693 910.857,96.207 911.057,96.007 911.357,95.907 911.857,95.907 912.157,96.007 912.457,96.307
  region net 12V: 899.657,96.407 899.625,98.393 901.057,99.507 896.057,99.507 897.725,98.393 897.725,96.593 897.957,96.107 898.157,95.907 898.457,95.807 898.957,95.807 899.257,95.907 899.557,96.207
  region net 12V: 886.957,96.407 886.925,98.393 888.357,99.507 883.357,99.507 885.025,98.393 885.025,96.593 885.257,96.107 885.457,95.907 885.757,95.807 886.257,95.807 886.557,95.907 886.857,96.207
  region net 12V: 874.257,96.407 874.225,98.393 875.657,99.507 870.657,99.507 872.325,98.393 872.325,96.593 872.557,96.107 872.757,95.907 873.057,95.807 873.557,95.807 873.857,95.907 874.157,96.207
  region net 12V: 861.557,96.407 861.525,98.393 862.957,99.507 859.625,100.093 859.625,96.593 859.857,96.107 860.057,95.907 860.357,95.807 860.857,95.807 861.157,95.907 861.457,96.207
  region net S1: 900.325,70.593 900.425,76.193 893.225,80.893 893.225,95.093 925.225,95.093 925.225,82.493 913.325,70.593 907.825,65.093 897.825,65.093 897.825,68.093
  region net S1: 895.225,97.693 895.225,96.093 893.825,94.593 898.825,94.593 897.125,96.093 896.925,97.993 896.725,98.193 896.425,98.293 895.925,98.293 895.625,98.193 895.325,97.893
  region net S1: 908.125,97.793 908.125,96.193 906.725,94.693 911.725,94.693 910.025,96.193 909.825,98.093 909.625,98.293 909.325,98.393 908.825,98.393 908.525,98.293 908.225,97.993
  region net S1: 920.625,97.693 920.625,96.093 919.225,94.593 924.225,94.593 922.525,96.093 922.325,97.993 922.125,98.193 921.825,98.293 921.325,98.293 921.025,98.193 920.725,97.893
  region net S2: 855.725,95.093 855.725,85.093 875.925,65.093 885.925,65.093 885.925,68.393 883.525,70.793 883.525,75.493 886.225,78.193 886.225,95.093
  region net S2: 869.825,97.693 869.825,96.093 868.425,94.593 873.425,94.593 871.725,96.093 871.525,97.993 871.325,98.193 871.025,98.293 870.525,98.293 870.225,98.193 869.925,97.893
  region net S2: 857.125,97.693 857.125,96.093 855.725,94.593 860.725,94.593 859.025,96.093 858.825,97.993 858.625,98.193 858.325,98.293 857.825,98.293 857.525,98.193 857.225,97.893
  region net S2: 882.525,97.693 882.525,96.093 881.125,94.593 886.125,94.593 884.425,96.093 884.225,97.993 884.025,98.193 883.725,98.293 883.225,98.293 882.925,98.193 882.625,97.893
Bottom Layer:
  region net GND: 927.825,69.593 916.125,69.593 910.125,63.693 898.225,63.693 896.725,65.093 896.725,69.093 898.825,70.693 898.825,75.093 886.825,75.093 885.325,75.193 885.325,70.593 886.825,69.093 886.825,55.493 902.525,55.493 922.925,44.393 927.925,44.393 927.925,52.893
  region net 12V: 931.325,97.593 931.325,96.593 927.625,92.293 927.625,72.093 929.825,70.293 929.825,44.593 938.325,44.593 938.325,56.393 938.425,56.493 938.325,56.593 938.325,89.093 936.325,91.093 936.325,99.293 932.625,103.093 929.525,103.093 929.525,99.393
  region net 12V: 925.057,96.407 925.025,98.393 926.457,99.507 921.457,99.507 923.125,98.393 923.125,96.593 923.357,96.107 923.557,95.907 923.857,95.807 924.357,95.807 924.657,95.907 924.957,96.207
  region net 12V: 912.557,96.507 912.525,98.493 913.957,99.607 908.957,99.607 910.625,98.493 910.625,96.693 910.857,96.207 911.057,96.007 911.357,95.907 911.857,95.907 912.157,96.007 912.457,96.307
  region net 12V: 899.657,96.407 899.625,98.393 901.057,99.507 896.057,99.507 897.725,98.393 897.725,96.593 897.957,96.107 898.157,95.907 898.457,95.807 898.957,95.807 899.257,95.907 899.557,96.207
  region net 12V: 886.957,96.407 886.925,98.393 888.357,99.507 883.357,99.507 885.025,98.393 885.025,96.593 885.257,96.107 885.457,95.907 885.757,95.807 886.257,95.807 886.557,95.907 886.857,96.207
  region net 12V: 874.257,96.407 874.225,98.393 875.657,99.507 870.657,99.507 872.325,98.393 872.325,96.593 872.557,96.107 872.757,95.907 873.057,95.807 873.557,95.807 873.857,95.907 874.157,96.207
  region net 12V: 861.557,96.407 861.525,98.393 862.957,99.507 859.625,100.093 859.625,96.593 859.857,96.107 860.057,95.907 860.357,95.807 860.857,95.807 861.157,95.907 861.457,96.207
  region net S1: 900.325,70.593 900.425,76.193 893.225,80.893 893.225,95.093 925.225,95.093 925.225,82.493 913.325,70.593 907.825,65.093 897.825,65.093 897.825,68.093
  region net S1: 895.225,97.693 895.225,96.093 893.825,94.593 898.825,94.593 897.125,96.093 896.925,97.993 896.725,98.193 896.425,98.293 895.925,98.293 895.625,98.193 895.325,97.893
  region net S1: 908.125,97.793 908.125,96.193 906.725,94.693 911.725,94.693 910.025,96.193 909.825,98.093 909.625,98.293 909.325,98.393 908.825,98.393 908.525,98.293 908.225,97.993
  region net S1: 920.625,97.693 920.625,96.093 919.225,94.593 924.225,94.593 922.525,96.093 922.325,97.993 922.125,98.193 921.825,98.293 921.325,98.293 921.025,98.193 920.725,97.893
  region net S2: 855.725,95.093 855.725,85.093 875.925,65.093 885.925,65.093 885.925,68.393 883.525,70.793 883.525,75.493 886.225,78.193 886.225,95.093
  region net S2: 869.825,97.693 869.825,96.093 868.425,94.593 873.425,94.593 871.725,96.093 871.525,97.993 871.325,98.193 871.025,98.293 870.525,98.293 870.225,98.193 869.925,97.893
  region net S2: 857.125,97.693 857.125,96.093 855.725,94.593 860.725,94.593 859.025,96.093 858.825,97.993 858.625,98.193 858.325,98.293 857.825,98.293 857.525,98.193 857.225,97.893
  region net S2: 882.525,97.693 882.525,96.093 881.125,94.593 886.125,94.593 884.425,96.093 884.225,97.993 884.025,98.193 883.725,98.293 883.225,98.293 882.925,98.193 882.625,97.893

## Silkscreen, mask and mechanical layers (free items; w line width, h text height)
Top Overlay:
  lines w0.1: 869.065,31.901 869.065,40.901 890.065,40.901 890.065,31.901 869.065,31.901 ; 937.771,45.45 959.271,45.45 959.271,85.45 937.771,85.45 937.771,45.45
  lines w0.2: 803.546,31.575 812.546,31.575 812.546,23.025 ; 803.546,31.65 803.546,100.025 812.546,100.025 812.546,109.025 ; 812.571,109.05 951.271,109.05 951.271,100.025 959.496,100.025 ; 812.596,23.025 950.546,23.025 950.546,32.025 959.546,32.025 959.546,99.975 ; 959.496,99.625 959.546,99.575
  lines w0.254: 854.651,76.05 929.651,76.05 929.651,93.05 854.651,93.05 854.651,76.05
  text "Fan 4x4" at 953.6,63 h1.52 r90
Bottom Paste:
  lines w1.5: 811.971,61.25 825.325,61.25 ; 820.56,65.95 825.351,65.95 ; 823.925,65.99 827.871,65.99 840.131,65.99 826.671,79.45 ; 825.351,61.25 832.571,61.25 ; 835.771,44.25 835.771,41.23 838.817,38.185 846.025,38.185 ; 843.371,44.25 854.271,44.25 ; 846.271,31.15 846.271,36.55 846.271,37.939 846.025,38.185 ; 849.756,83.596 849.756,78.596 863.771,64.581 863.771,62.45 ; 851.371,31.15 857.171,31.15 ; 886.645,32.413 883.525,29.293 868.525,29.293 859.633,38.185 846.025,38.185 ; 826.671,79.45 826.671,83.65 826.671,79.45 ; 861.871,44.25 867.22,38.901 ; 861.871,44.25 861.871,44.55 ; 861.871,44.25 867.22,38.901 ; 861.871,44.25 861.871,44.55 ; 861.871,44.55 840.431,65.99 861.871,44.55 ; 867.22,38.901 871.425,38.901 867.22,38.901 ; 871.825,33.893 871.825,38.893 871.825,33.893
  lines w2: 857,93.6 884.7,93.6 ; 860.611,101.099 930.301,101.099 933.8,97.6 933.8,46.5 ; 868.8,93.6 872,90.4 875.2,93.6 ; 872,72.2 872,93.6 ; 892,72.2 892,64.6 897.4,59.2 925,59.2 ; 894.9,93.6 923.8,93.6 ; 903.9,93.6 906.9,90.6 ; 907,72.2 907,93.6 ; 907.2,90.7 909.9,93.4 ; 925.271,47.05 925.271,65.45
Bottom Solder:
  lines w1.5: 811.971,61.25 825.325,61.25 ; 820.271,65.95 840.131,65.99 826.671,79.45 ; 825.351,61.25 832.571,61.25 ; 835.771,44.25 835.771,41.23 838.817,38.185 846.025,38.185 ; 840.431,65.99 861.871,44.55 ; 843.371,44.25 854.271,44.25 ; 846.271,31.15 846.271,36.55 846.271,37.939 846.025,38.185 ; 849.756,83.596 849.756,78.596 863.771,64.581 863.771,62.45 ; 851.371,31.15 857.171,31.15 ; 886.645,32.413 883.525,29.293 868.525,29.293 859.633,38.185 846.025,38.185 ; 826.671,79.45 826.671,83.65 826.671,79.45 ; 861.871,44.25 861.871,44.55 ; 861.871,44.25 867.22,38.901 ; 861.871,44.25 861.871,44.55 ; 867.22,38.901 871.425,38.901 867.22,38.901 ; 871.825,33.893 871.825,38.893 871.825,33.893
  lines w2: 857,93.6 884.7,93.6 ; 860.611,101.099 930.418,101.002 930.418,100.982 ; 868.8,93.6 872,90.4 ; 872,72.2 872,93.6 ; 872,90.1 872,90.4 ; 872,90.3 872,90.4 ; 875.2,93.6 872,90.4 ; 892,72.2 892,64.6 897.4,59.2 925,59.2 ; 894.9,93.6 923.8,93.6 ; 903.9,93.6 906.9,90.6 907,90.6 ; 907,72.2 907,83.3 907,93.6 ; 907,90.7 907.2,90.7 909.9,93.4 ; 925.271,47.05 925.271,65.45 ; 930.4,101 933.782,97.618 ; 933.8,46.5 933.8,97.6